# Altium PCB PCB1.PcbDoc
Units mil, origin at the board's own origin, x right, y up, seen from the top; angles counter-clockwise.
Board outline 3650 x 1995 mil, 2 copper layers (Top Layer, Bottom Layer); 14 components, 12 nets, 32 pads, 1 vias.
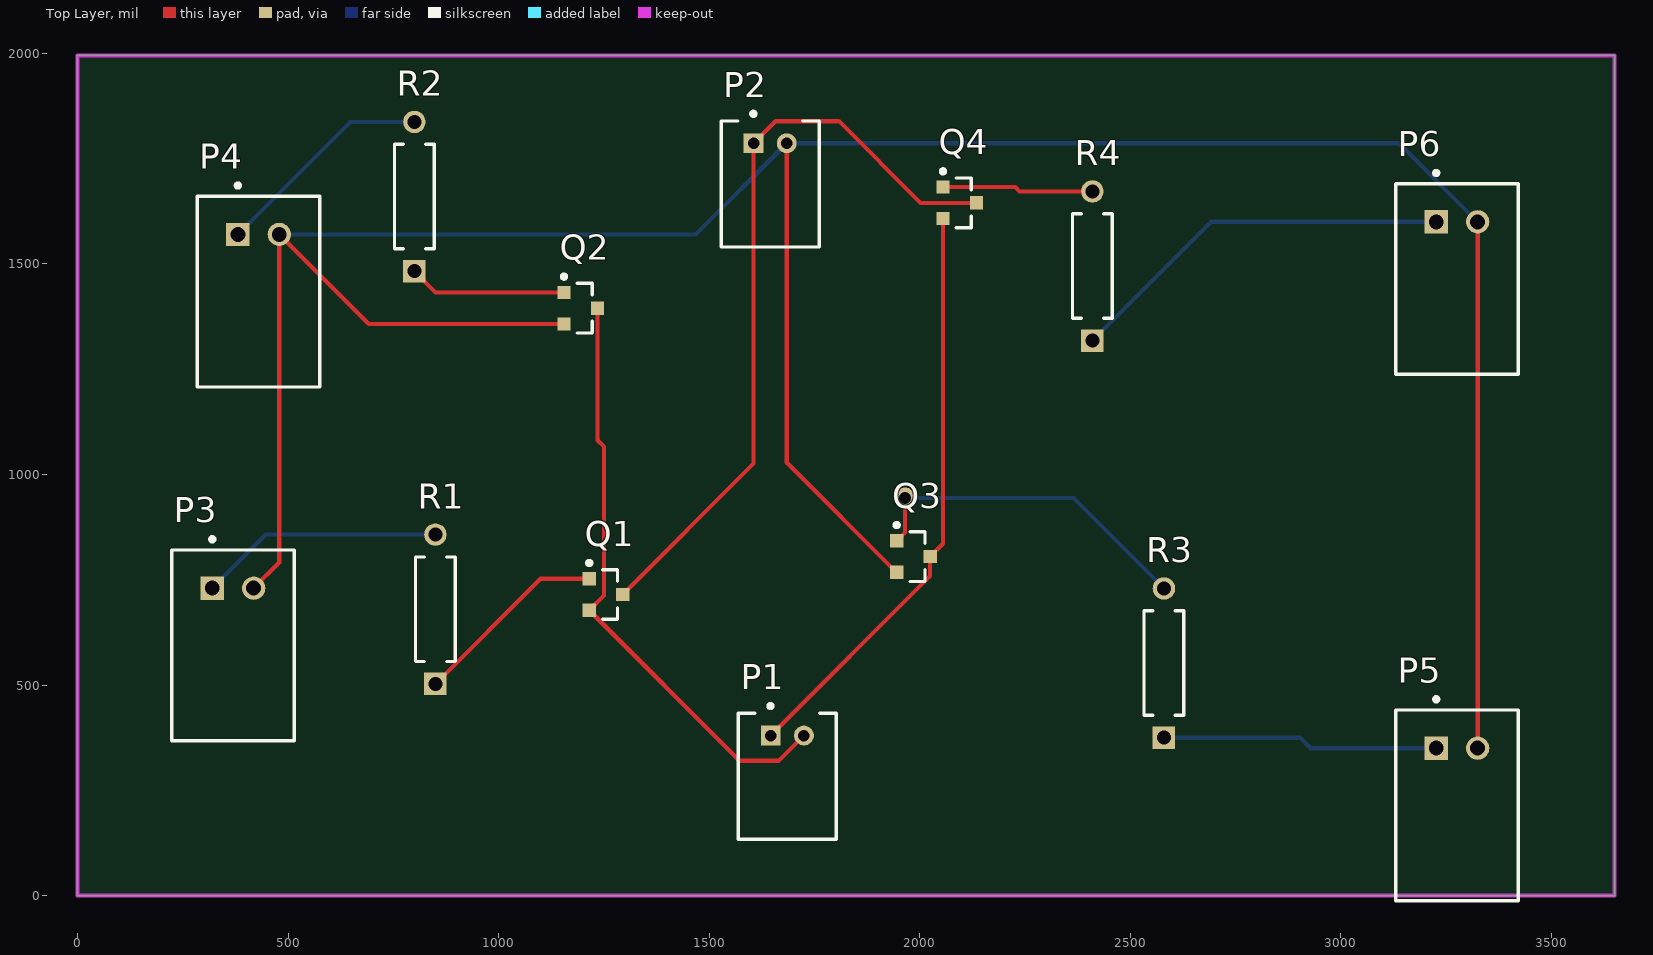
[diagram p0: Top Layer view]
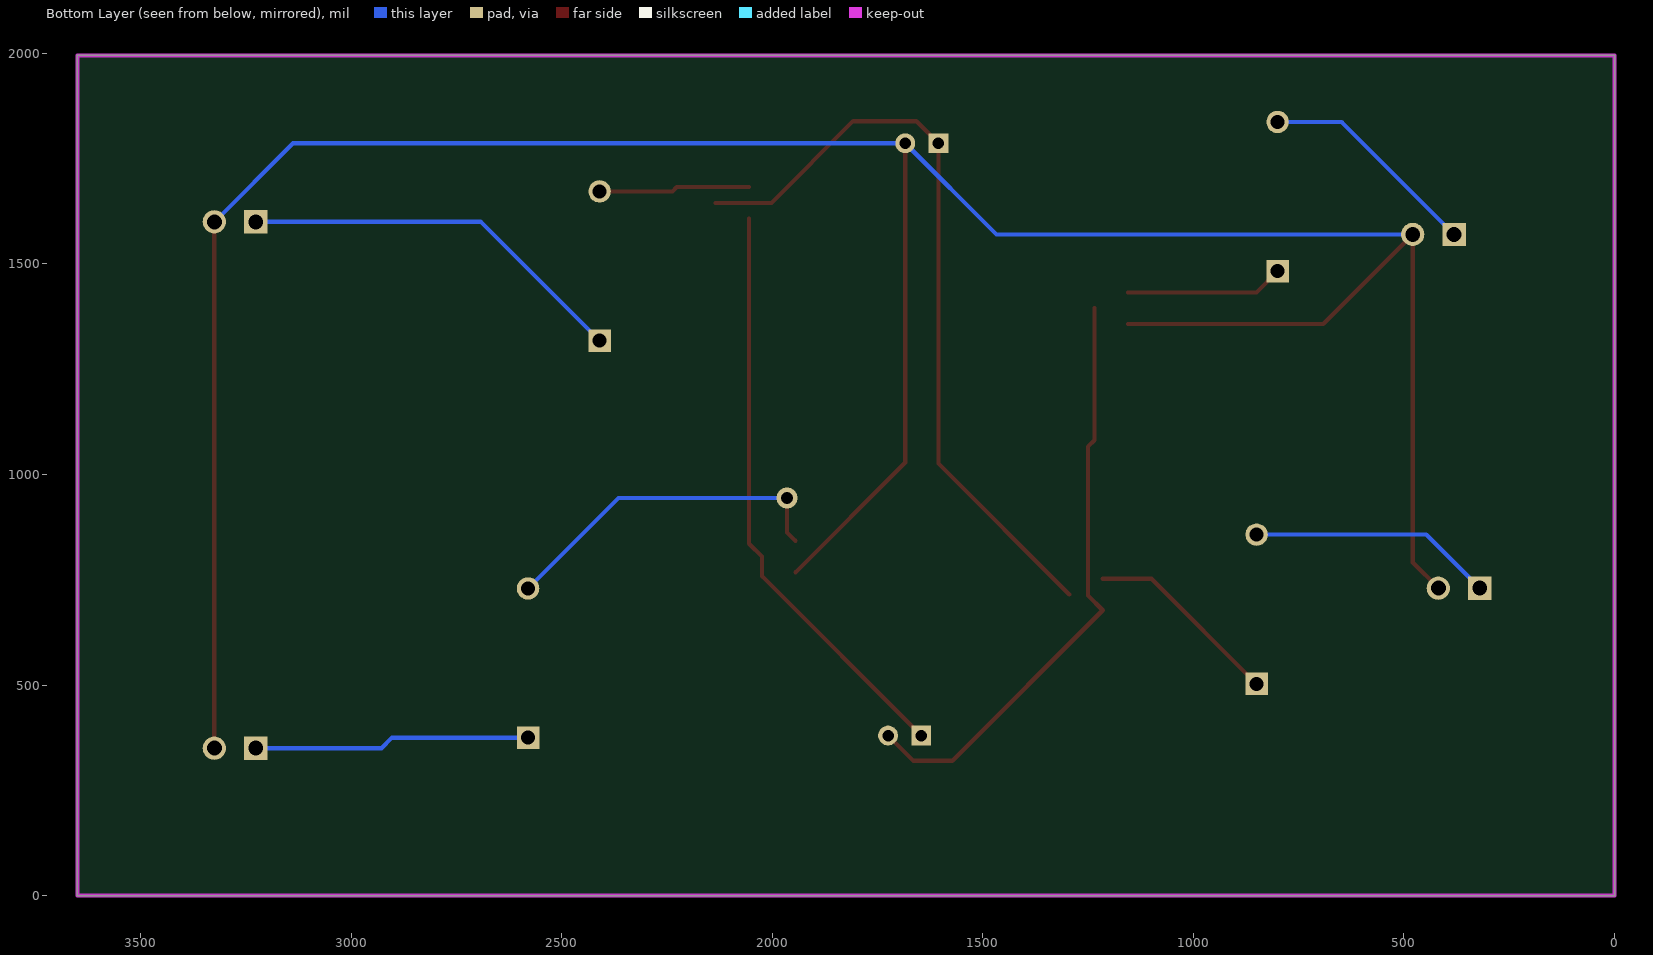
[diagram p1: Bottom Layer view, seen from below]
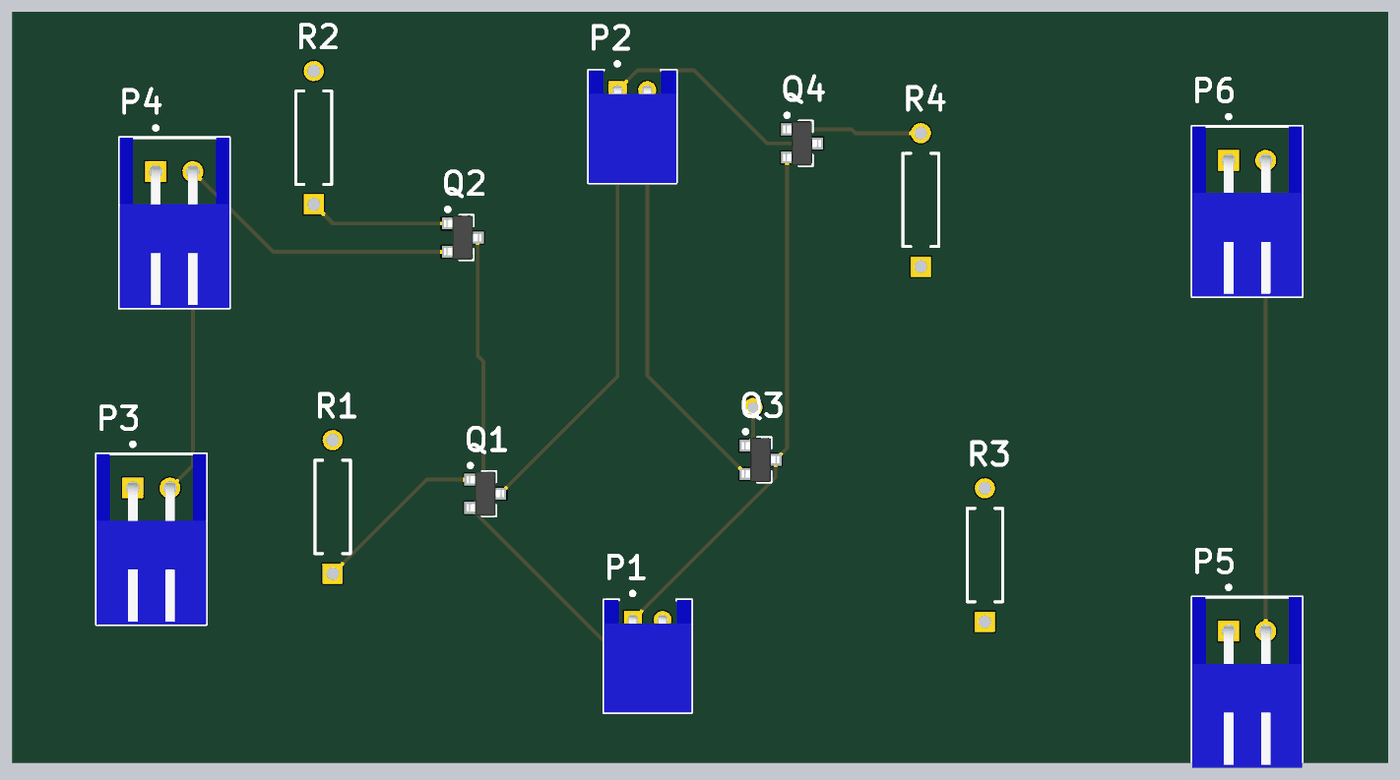
[diagram p2: 3D render of the assembled board from above, using the file's embedded part models]

## Layer stack, top to bottom
Top Solder: solder mask 0.4, Solder Resist, Dk 3.5
Top Layer: signal copper 1.4
Dielectric 1: dielectric 12.6, FR-4, Dk 4.8
Bottom Layer: signal copper 1.4
Bottom Solder: solder mask 0.4, Solder Resist, Dk 3.5

## Board outline
0,0 0,1995 3650,1995 3650,0

## Design rules (kind name [scope] priority, off if disabled: settings)
Clearance [All] p1: gap=10 ignorepadtopadclearanceinfootprint=FALSE
PolygonConnect [All] p1: connectstyle=Relief reliefconductorwidth=10 reliefentries=4 polygonreliefangle="90 Angle" airgapwidth=10
RoutingVias [All] p1: holewidth=28 width=50 viastyle="Through Hole" minholewidth=28 minwidth=50 maxholewidth=28 maxwidth=50
SolderMaskExpansion [All] p1: expansion=4 istentingtop=FALSE
Width [All] p1: maxlimit=10 minlimit=10 preferedwidth=10
30 further rules are at their usual default settings.

## Components (designator, comment, footprint, x,y, rotation, side; value= is the part's Value field where it differs from the comment)
P1 "S2B-PH-K-S(LF)(SN)" JST-S2B-PH-K-S_V 1685.63,283.54 r0 top
P2 "S2B-PH-K-S(LF)(SN)" JST-S2B-PH-K-S_V 1645,1690 r0 top
P3 "S2B-XH-A(LF)(SN)" JST-S2B-XH-A(LF)(SN)_V 369.21,730 r0 top
P4 "S2B-XH-A(LF)(SN)" JST-S2B-XH-A(LF)(SN)_V 430,1570 r0 top
P5 "S2B-XH-A(LF)(SN)" JST-S2B-XH-A(LF)(SN)_V 3275.79,350 r0 top
P6 "S2B-XH-A(LF)(SN)" JST-S2B-XH-A(LF)(SN)_V 3275.79,1600 r0 top
Q1 "CJ2305" JSCJ-SOT23-3_V 1255,715 r0 top
Q2 "CJ2305" JSCJ-SOT23-3_V 1195,1395 r0 top
Q3 "CJ2302" JSCJ-SOT23-3_V 1985,805 r0 top
Q4 "CJ2302" JSCJ-SOT23-3_V 2095,1645 r0 top
R1 "MFR-25FBF52-10K" RESA60-630X240 850,680 r90 top value=1k
R2 "MFR-25FBF52-10K" RESA60-630X240 800,1660 r90 top value=1k
R3 "MFR-25FBF52-10K" RESA60-630X240 2580,552.17 r90 top value=1k
R4 "MFR-25FBF52-10K" RESA60-630X240 2410,1495 r90 top value=1k

## Footprints (in the part's own frame and the unit in brackets; to place one, negate y for a bottom-side part, rotate by r counter-clockwise, add the part's x,y. Pads: shape width x height; smd on the part's side, far side on the other; paste and mask are expansions set on the pad)
JSCJ-SOT23-3_V [mm] "SOT23, 3-Leads, Body 3x1.4mm, Pitch 0.95mm"
  rect 0.8x0.8 smd: 1(-1.01,0.95) 2(-1.01,-0.95) 3(1.01,0)
  silkscreen extent -1.13,-1.5 0.7,2.02, body extent -1.28,-1.5 1.28,1.5, height 1.15
JST-S2B-PH-K-S_V [mm] "THD, 2-Leads, Body 7.6x5.9mm, Pitch 2mm"
  rect 1.2x1.2 hole 0.7: 1(-1,2.45)
  round 1.2 hole 0.7: 2(1,2.45)
  silkscreen extent -2.95,-3.8 2.95,4.35, body extent -2.95,-3.8 2.95,3.8, height 4.8
JST-S2B-XH-A(LF)(SN)_V [mm] "Header, 2-Leads, Body 7.4x11.5mm, Pitch 2.5mm"
  rect 1.4x1.4 hole 0.9: 1(-1.25,0)
  round 1.4 hole 0.9: 2(1.25,0)
  silkscreen extent -3.7,-9.2 3.7,3.08, body extent -3.7,-9.2 3.7,2.3, height 5.95
RESA60-630X240 [mm] "Axial Resistor, 2-Leads, Dia 2.4mm, Body Length 6.3mm"
  rect 1.35x1.35 hole 0.85: 1(-4.5,0)
  round 1.35 hole 0.85: 2(4.5,0)
  silkscreen extent -3.15,-1.2 3.15,1.2, body extent -4.77,-1.19 4.77,1.2, height 2.4

## Part data
P1 P2: library part CMP-002-00030-2, "Male Header, Pitch 2 mm, 1 x 2 Position, Height 4.8 mm, Tail Length 3.4 mm, -25 to 85 degC, RoHS, Bulk", Case/Package=S2B-PH-K-S, Manufacturer="Japan Solderless Terminals", Max Operating Temperature=85°C, Min Operating Temperature=-25°C, Package Description="Male Header, Pitch 2 mm, 1 x 2 Position, Height 4.8 mm, Tail Length 3.4 mm", Connector Type=Header, Datasheet URL=http://www.jst-mfg.com/product/pdf/eng/ePH.pdf, Datasheet Version=Dec-12, Gender=Male, Mounting Technology=SM, Package Reference=S2B-PH-K-S, RoHS Compliant=Unknown
P3 P4 P5 P6: library part CMP-002-00032-2, "Male Header, Pitch 2.5 mm, 1 x 2 Position, Height 6.1 mm, Tail Length 3.4 mm, -25 to 85 degC, RoHS, Bulk", Manufacturer=JST, Max Operating Temperature=85°C, Min Operating Temperature=-25°C, Package Description="XH Series Disconnectable Crimp Style Connector, Pitch 2.5 mm, 1 x 2 Position, Height 6.1 mm, Tail Length 3.4 mm", Case/Package=S2B-XH-A(LF)(SN), Connector Type=Header, Datasheet URL=http://www.jst-mfg.com/product/pdf/eng/eXH.pdf, Datasheet Version=May-16, Gender=Male, Manufacturer URL=http://www.jst.com/home2.html, Mounting Technology=TH, Package Reference=S2B-XH-A(LF)(SN), RoHS Compliant=Unknown
Q1 Q2: library part CMP-013-00015-3, "P-Channel Plastic Encapsulate MOSFET, 12 V, 4.1 A, 3-Pin SOT23, Tape and Reel", Case/Package=SOT23-3, Manufacturer="Jiangsu Changjiang Electronics Technology", Package Description="3-Pin Small Outline Transistor, Body 2.9 x 1.3 mm, Pitch 0.95 mm", Package Version="Rev. E, 09/2009", Datasheet URL=http://www.cj-elec.com/gallery/txUpfile/5140ba9ed47d18467ea4bddc055cd747.pdf, Datasheet Version="Rev. F, 04/2015", Mounting Technology=SM, Package Reference=SOT23-3, RoHS Compliant=Unknown
Q3 Q4: library part CMP-013-00014-3, "N-Channe Plastic Encapsulate MOSFET, 20 V, 2.1 A, 3-Pin SOT23, Tape and Reel", Case/Package=SOT23-3, Manufacturer="Jiangsu Changjiang Electronics Technology", Package Description="3-Pin Small Outline Transistor, Body 2.9 x 1.3 mm, Pitch 0.95 mm", Package Version="Rev. E, 09/2009", Datasheet URL=http://www.cj-elec.com/gallery/txUpfile/9c19fa03e8d43801a6647d386a41a240.pdf, Datasheet Version="Rev. D, 08/2015", Mounting Technology=SM, Package Reference=SOT23-3, RoHS Compliant=Unknown
R1 R2 R3 R4: library part CMP-009-00047-4, "Axial Resistor, 10 KOhm, +/- 1%, 0.25 W, -55 to 155 degC, 2-Pin THD, RoHS, Bulk", Case/Package=Axial, Manufacturer=Yageo, Max Operating Temperature=155°C, Min Operating Temperature=-55°C, Package Description="2-Pin Axial Lead, Dia 2.4 mm, Body Length 6.3 mm", Package Quantity=200, Package Reference=MFR-25, Power=250mW, Tolerance=1%, Voltage Rating=250V, Datasheet URL=http://www.yageo.com/documents/recent/Yageo%20LR_MFR_2013.pdf, Datasheet Version=Apr-13, Manufacturer URL=http://www.yageo.com/, Mounting Technology=TH, Packaging=Bulk, RoHS Compliant=True

## Via types
v1: diameter 50, hole 28, Top Layer to Bottom Layer, 1 vias

## Nets (pads, with @x,y where several pads share a name; then routed paths per layer and width w, separated by ;. In a path a pad name is that pad's centre, name@x,y a point inside that pad or via, vN(x,y) a via of type N, cw(c..) or ccw(c..) an arc to the next point about the centre after c; other vN are vias at no path point)
+12: P2.1 Q1.3 Q4.3 | length 1831.5
  Top Layer w10: Q1.3 1605.63,1025.87 P2.1 1658.17,1839 1808,1839 2002,1645 Q4.3
GND: P2.2 P3.2 P4.2 P5.2 P6.2 Q2.2 Q3.2 | length 7018.8
  Top Layer w10: P3.2 479.21,790.79 P4.2 691.61,1357.6 Q2.2 ; P2.2 1684.37,1028.46 Q3.2 ; P5.2 P6.2
  Bottom Layer w10: P4.2 1467.91,1570 P2.2 3138.54,1786.46 P6.2
NetP1_1: P1.1 Q3.3 Q4.2 | length 1397
  Top Layer w10: P1.1 2024.76,758.5 Q3.3 2055.24,835.47 Q4.2
NetP1_2: P1.2 Q1.2 Q2.3 | length 1420.9
  Top Layer w10: Q2.3 1234.76,1081.24 1250,1066 1250,712.36 Q1.2 1572.83,320 1665,320 P1.2
NetP3_1: P3.1 R1.2 | length 582.7
  Bottom Layer w10: P3.1 447.17,857.17 R1.2
NetP4_1: P4.1 R2.2 | length 529.9
  Bottom Layer w10: P4.1 647.95,1837.17 R2.2
NetP5_1: P5.1 R3.1 | length 656.9
  Bottom Layer w10: R3.1 2903,375 2928,350 P5.1
NetP6_1: P6.1 R4.1 | length 933.5
  Bottom Layer w10: R4.1 2692.17,1600 P6.1
NetQ1_1: Q1.1 R1.1 | length 468.6
  Top Layer w10: R1.1 1099.57,752.4 Q1.1
NetQ2_1: Q2.1 R2.1 | length 376.1
  Top Layer w10: R2.1 850.43,1432.4 Q2.1
NetQ3_1: Q3.1 R3.2 | length 813.7
  Top Layer w10: Q3.1 1965,862.17 v1(1965,944)
  Bottom Layer w10: v1(1965,944) 2365.33,944 R3.2
NetQ4_1: Q4.1 R4.2 | length 359
  Top Layer w10: Q4.1 2227,1682.4 2237.24,1672.17 R4.2

## Keep-outs
Keep-Out Layer:
  the board outline again, w10